# EAGLE board SWDAP (EAGLE 6.2)
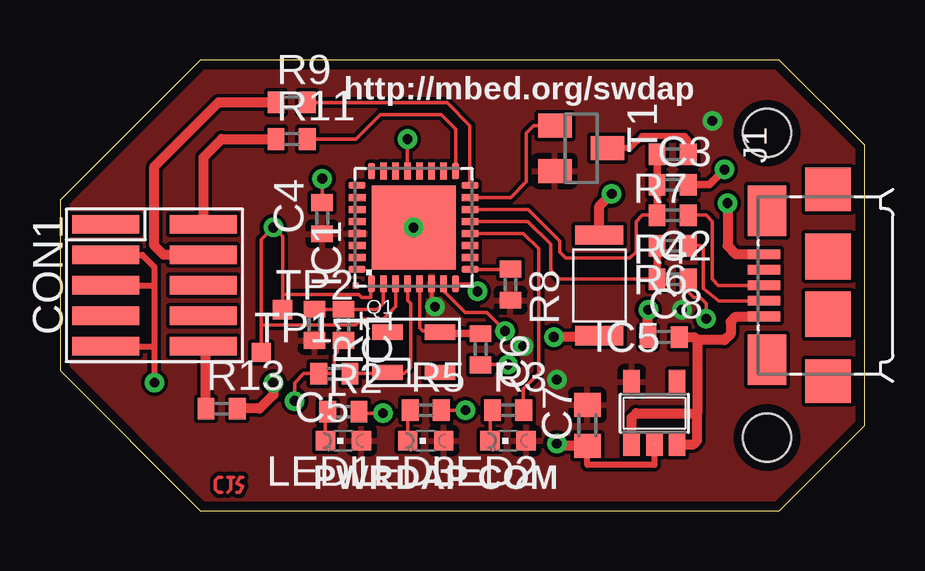
[diagram p0: board, top side]
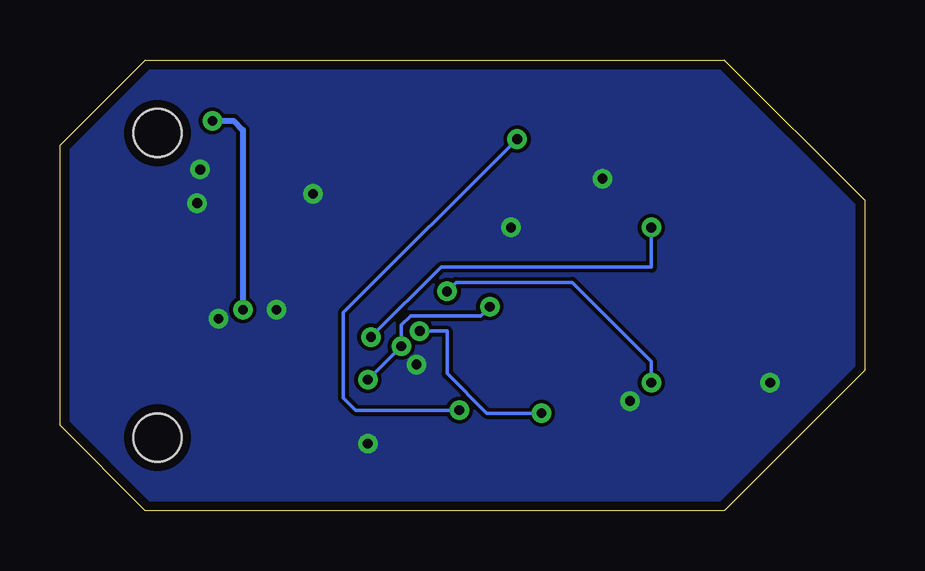
[diagram p1: board, bottom side, seen from below]

Size 33.53 x 18.8 mm. Coordinates in mm from the lower left corner, seen from the top.
Outline: 33.53,3.56 33.53,15.24 29.97,18.8 5.84,18.8 0,12.95 0,5.84 5.84,0 29.97,0 33.53,3.56
Copper layers (1*16): Top 0.035mm / dielectric 1.5mm / Bottom 0.035mm
Design rules: minimum track width 6mil, minimum drill 15mil, track to track 6mil, track to pad 6mil, pad to pad 6mil, via to via 6mil, smd to smd 6mil, copper to edge 15mil, drill to drill 8mil, minimum pad ring 10mil, minimum via ring 8mil, stop-mask expansion 4mil, vias tented up to drill 0mil, thermal gap 10mil
Holes 2 mm at 29.46,3.05 29.46,15.75

## Footprints (pad centres in the part's own frame; a part is rotated, then mirrored left to right if it is on the bottom)
0402 = smd 0.7 x 0.9: 1 -0.65,0; 2 0.65,0
0603 = smd 1 x 1.1: 1 -0.85,0; 2 0.85,0
SWD-10-SMD = smd 0.762 x 2.794: P$1 0.381,-2.032; P$2 0.381,2.032; P$3 1.651,-2.032; P$4 1.651,2.032; P$5 2.921,-2.032; P$6 2.921,2.032; P$7 4.191,-2.032; P$8 4.191,2.032; P$9 5.461,-2.032; P$10 5.461,2.032
HVQFN33 = smd 0.7 x 0.28: 1 -2.35,1.75; 2 -2.35,1.25; 3 -2.35,0.75; 4 -2.35,0.25; 5 -2.35,-0.25; 6 -2.35,-0.75; 7 -2.35,-1.25; 8 -2.35,-1.75; 17 2.35,-1.75; 18 2.35,-1.25; 19 2.35,-0.75; 20 2.35,-0.25; 21 2.35,0.25; 22 2.35,0.75; 23 2.35,1.25; 24 2.35,1.75 | smd 0.28 x 0.7: 9 -1.75,-2.35; 10 -1.25,-2.35; 11 -0.75,-2.35; 12 -0.25,-2.35; 13 0.25,-2.35; 14 0.75,-2.35; 15 1.25,-2.35; 16 1.75,-2.35; 25 1.75,2.35; 26 1.25,2.35; 27 0.75,2.35; 28 0.25,2.35; 29 -0.25,2.35; 30 -0.75,2.35; 31 -1.25,2.35; 32 -1.75,2.35 | smd 3.5 x 3.5: EXP 0,0 | smd 0.25 x 0.25: M1 -2.415,2.415
SOT23-5 = smd 0.69 x 0.99: 1 -0.95,-1.29; 2 0,-1.29; 3 0.95,-1.29; 4 0.95,1.3; 5 -0.95,1.3
ZX62-B-5PA(11) = smd 0.4 x 1.35: 1 -1.3,2.675; 2 -0.65,2.675; 3 0,2.675; 4 0.65,2.675; 5 1.3,2.675 | smd 2.1 x 1.6: SH1 -3.1,2.55; SH2 3.1,2.55 | smd 1.8 x 1.9: SH3 -4,0; SH6 4,0 | smd 1.9 x 1.9: SH4 -1.2,0; SH5 1.2,0
CHIPLED_0603 = smd 0.8 x 0.8: A 0,-0.75; C 0,0.75
3.2X.2.5 = smd 1.27 x 0.635: P$1 -1.092,-0.838; P$2 1.092,-0.838; P$3 1.092,0.838; P$4 -1.092,0.838
SKRKAEE010 = smd 0.8 x 2: P$1 -2.1,0; P$2 2.1,0
SOT23 = smd 1 x 1.4: 1 -0.95,-1.1; 2 0.95,-1.1; 3 0,1.1
TP08SQ = smd 0.8 x 0.8: TP 0,0

## Placement (x,y rotation side)
C1  100nF  [0402]  11.81,7.75 270 top
C2  18pF  [0402]  25.53,9.65 0 top
C3  18pF  [0402]  25.53,13.59 0 top
C4  100nF  [0402]  10.92,12.19 90 top
C5  18pF  [0402]  11.43,5.71 180 top
C6  18pF  [0402]  17.53,6.73 270 top
C7  10uF  [0603]  21.97,3.56 90 top
C8  1uF  [0402]  25.15,7.24 0 top
CON1  SWD-10_SMD  [SWD-10-SMD]  3.94,12.32 270 top
IC1  [HVQFN33]  14.73,11.81 90 top
IC5  [SOT23-5]  24.77,4.06 0 top
J1  ZX62-B-5PA  [ZX62-B-5PA(11)]  32,9.4 90 top
LED1  RED  [CHIPLED_0603]  11.81,2.92 90 top
LED2  RED  [CHIPLED_0603]  18.67,2.92 90 top
LED3  RED  [CHIPLED_0603]  15.24,2.92 90 top
Q1  12MHz  [3.2X.2.5]  14.73,6.6 0 top
R1  10k  [0402]  10.6,7.75 270 top
R2  470R  [0402]  11.81,4.13 0 top
R3  470R  [0402]  18.67,4.19 0 top
R4  33R  [0402]  25.53,12.32 180 top
R5  470R  [0402]  15.24,4.19 0 top
R6  33R  [0402]  25.53,11.05 180 top
R7  1k5  [0402]  25.53,14.86 180 top
R8  10k  [0402]  18.77,9.42 270 top
R9  470R  [0402]  9.65,17.02 0 top
R11  470R  [0402]  9.65,15.49 0 top
R13  470R  [0402]  6.73,4.25 0 top
SW1  SPST_SKRKAWW010  [SKRKAEE010]  22.48,9.4 270 top
T1  BSS84  [SOT23]  21.72,15.11 270 top
TP1  TPTP08SQ  [TP08SQ]  8.38,6.6 0 top
TP2  TPTP08SQ  [TP08SQ]  9.27,8.38 0 top

## Library data of the parts
C1-C8 CON1 IC1 LED1-LED3 Q1 R1-R9 R11 R13 T1 = mbed-HDK
IC5 = Karasouli
J1 = hirose
SW1 = mbed-switches
TP1 TP2 = testpad

## Nets
+3,3V: C4.1 C7.2 IC1.6 IC1.29 IC5.5 LED1.A LED2.A LED3.A R1.2 R8.2 T1.2
GND: C1.2 C2.2 C3.2 C4.2 C5.2 C6.2 C7.1 C8.1 CON1.P$3 CON1.P$5 CON1.P$9 IC1.EXP IC5.2 J1.5 SW1.P$1
HID: IC1.12 R3.2
IF_NRESET: C1.1 IC1.2 R1.1
ISP: IC1.1 IC1.3 SW1.P$2 TP1.TP TP2.TP
MSD: IC1.7 R2.2
N$1: C3.1 IC1.14 R4.2 R7.2
N$2: C2.1 IC1.13 R6.2
N$3: J1.2 R6.1
N$4: J1.3 R4.1
N$5: LED1.C R2.1
N$6: R7.1 T1.3
N$7: IC1.9 R8.1
N$8: LED2.C R3.1
N$9: LED3.C R5.1
N$12: C6.1 IC1.5 Q1.P$3
N$14: C5.1 IC1.4 Q1.P$1
N$19: IC1.15 T1.1
TGT_NRESET: IC1.8 R13.2
TGT_NRESET_BUF: CON1.P$10 R13.1
TGT_SWCLK: IC1.16 R9.2
TGT_SWCLK_BUF: CON1.P$4 R9.1
TGT_SWDIO: IC1.17 R11.2
TGT_SWDIO_BUF: CON1.P$2 R11.1
UART: IC1.21 R5.2
VBUS: C8.2 IC5.1 IC5.3 J1.1

## Tracks (layer width: path | path; a pad name or v marks a point on that pad's centre or on a via)
+3,3V  (via drill 0.41)
  Top 0.152: IC1.6 15.48,8.65 v15.62,8.51
  Bottom 0.152: v15.62,8.51 16,8.13 18.92,8.13 19.3,7.75 v19.3,6.86 v20.7,5.46
  Bottom 0.254: v27.18,16.26 26.29,16.26 25.91,15.88 v25.91,8.38
  pour Top: -5.08,19.18 -5.08,-0.25 34.54,-0.25 34.54,19.18
GND  (via drill 0.41)
  Top 0.152: C1.2 11.56,6.84 11.56,6.6 11.43,6.48 11.43,5.84 11.3,5.71 C5.2 10.16,5.71 9.78,5.33 v9.78,4.57 | C4.2 v10.92,13.84 10.68,14.08 | C6.2 17.54,6.1 v18.67,6.1 | C2.2 26.18,9.13 26.42,8.89 26.67,8.89 26.92,8.64 v26.92,8
  Top 0.254: IC5.2 24.77,1.9 21.97,1.9 C7.1 | CON1.P$3 3.43,10.67 3.94,10.16 3.94,9.4 | 3.94,9.4 3.94,6.86 | 3.94,6.86 v3.94,5.33 | CON1.P$9 3.94,6.86 | CON1.P$5 3.94,9.4
  Top 0.305: v27.69,14.22 27.05,13.59 C3.2
  Top 0.406: C7.1 20.7,2.71 v20.7,2.79 | C7.1 22.1,2.71 | 22.01,2.67 C7.1 | C8.1 24.5,8.37 v24.51,8.38 | 27.81,14.1 v27.69,14.22 | v27.81,12.83 27.81,11.05 28.16,10.7 J1.5 | SW1.P$1 22.48,12.7 v22.99,13.21
  other vias: 14.73,11.81
  pour Bottom: -5.08,-0.25 34.54,-0.25 34.54,19.18 -5.08,19.18
HID
  Top 0.152: IC1.12 19.3,11.56 19.94,10.92 19.94,5.71 19.3,5.08 19.3,4.21 R3.2
IF_NRESET
  Top 0.152: R1.1 C1.1 13.22,8.4 13.46,8.64 13.46,9.44 IC1.2
ISP  (via drill 0.41)
  Top 0.152: IC1.1 12.95,9.46 12.95,8.89 12.57,8.89 12.45,9.02 9.27,9.02 | IC1.3 13.98,8.52 13.46,8 12.57,8 12.32,7.75 8.38,7.75 | 8.38,7.75 8.38,11.3 v8.89,11.81 9.27,11.43 9.27,9.02 | TP1.TP 8.38,7.75 | TP2.TP 9.27,9.02
  Top 0.406: SW1.P$2 22.42,7.24 v20.57,7.24
  Bottom 0.152: v8.89,11.81 8.89,10.16 17.65,10.16 v20.57,7.24
MSD  (via drill 0.41)
  Top 0.152: IC1.7 15.98,9.16 16.89,8.25 17.78,8.25 v18.54,7.49 | v13.46,4.06 12.53,4.06 R2.2
  Bottom 0.152: v18.54,7.49 17.4,7.49 17.4,5.71 15.75,4.06 v13.46,4.06
N$1
  Top 0.152: IC1.14 19.51,12.56 20.83,11.24 20.83,10.79 21.08,10.54 23.75,10.54 24,10.79 24,12.06 24.26,12.32 R4.2
  Top 0.305: R4.2 C3.1 R7.2
N$2
  Top 0.152: IC1.13 19.5,12.06 20.45,11.11 20.45,10.03 20.83,9.65 C2.1
  Top 0.305: R6.2 C2.1
N$3
  Top 0.152: R6.1 26.67,11.05 26.8,10.92 26.8,9.91 26.8,9.78 26.8,9.27 27.43,8.76 27.45,8.75 J1.2
N$4
  Top 0.152: R4.1 26.92,12.32 27.18,12.06 27.18,9.65 27.43,9.4 J1.3
N$5
  Top 0.152: LED1.C 11.06,3.9 R2.1
N$6
  Top 0.254: R7.1 26.18,15.48 26.03,15.62 24.26,15.62 23.75,15.11 T1.3
N$7
  Top 0.152: IC1.9 18.76,10.06 R8.1
N$8
  Top 0.152: LED2.C 17.92,4.09 R3.1
N$9
  Top 0.152: LED3.C 14.49,4.09 R5.1
N$11
  Top 0.152: 6.73,1.4 6.6,1.4 6.48,1.27 6.48,0.89 6.6,0.76 6.73,0.76
N$12
  Top 0.152: IC1.5 14.98,7.62 15.11,7.49 15.77,7.49 Q1.P$3
  Top 0.305: Q1.P$3 15.88,7.38 C6.1
N$13
  Top 0.152: 6.99,1.4 7.11,1.4 | 7.11,1.4 7.24,1.4 | 7.11,1.4 7.11,0.89 6.99,0.76
N$14
  Top 0.152: IC1.4 14.48,8.76 14.6,8.64 14.61,5.97 14.35,5.71 13.69,5.71 Q1.P$1 13.59,5.71 C5.1
N$15
  Top 0.152: 7.62,1.4 7.49,1.4 7.37,1.14 7.62,1.02 7.49,0.76 7.37,0.76
N$19
  Top 0.152: IC1.15 18.78,13.06 19.43,13.72 19.43,15.75 19.69,16 19.75,16.06 T1.1
TGT_NRESET  (via drill 0.41)
  Top 0.152: IC1.8 17.08,9.46 v17.4,9.14
  Top 0.406: v8.89,5.33 8.89,4.83 8.32,4.25 R13.2
  Bottom 0.152: v17.4,9.14 17.02,9.53 12.19,9.53 8.89,6.22 v8.89,5.33
TGT_NRESET_BUF
  Top 0.406: 6.03,6.79 CON1.P$10 6.08,6.75 R13.1
TGT_SWCLK
  Top 0.152: IC1.16 17.08,16.06 16.13,17.02 R9.2
TGT_SWCLK_BUF
  Top 0.406: CON1.P$4 4.32,10.67 3.94,11.05 3.94,14.35 6.6,17.02 R9.1
TGT_SWDIO
  Top 0.152: IC1.17 16.48,15.9 15.87,16.51 13.33,16.51 12.32,15.49 R11.2
TGT_SWDIO_BUF
  Top 0.406: CON1.P$2 5.97,14.73 6.73,15.49 R11.1
UART  (via drill 0.41)
  Top 0.152: IC1.21 v14.48,15.49 | v16.89,4.19 R5.2
  Bottom 0.152: v14.48,15.49 21.72,8.25 21.72,4.7 21.21,4.19 v16.89,4.19
VBUS
  Top 0.406: IC5.1 23.81,3.88 24,4.06 26.54,4.06 | IC5.3 26.4,2.77 26.54,2.92 26.54,3.81 26.54,4.06 | C8.2 26.42,7.24 26.54,7.11 | 26.54,7.11 26.54,4.06 | 26.54,7.11 27.69,7.11 27.94,7.37 27.94,7.87 28.16,8.1 J1.1

## Text on the board
TopSilkscreen: http://mbed.org/swdap | PWR | DAP | COM
BottomSilkscreen: http://mbed.org/swdap | USB CMSIS-DAP Interface | for Serial Wire Debug